# Altium PCB minireg-adp7102.PcbDoc
Units mm, origin at the board's own origin, x right, y up, seen from the top; angles counter-clockwise.
Board outline 10 x 10 mm, 4 copper layers (Top Layer, Mid-Layer 1, Mid-Layer 2, Bottom Layer); 9 components, 6 nets, 63 pads, 26 vias.
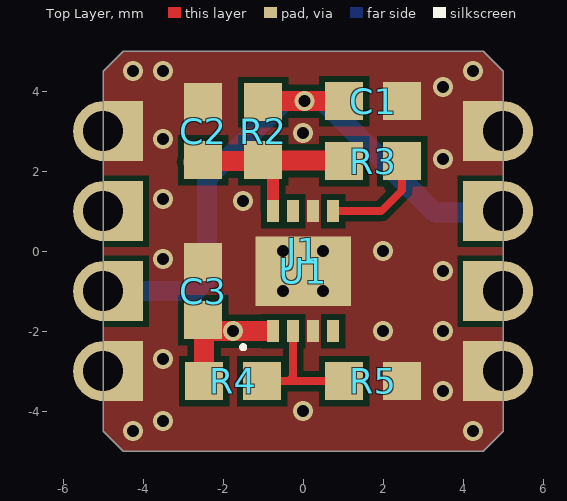
[diagram p0: Top Layer view]
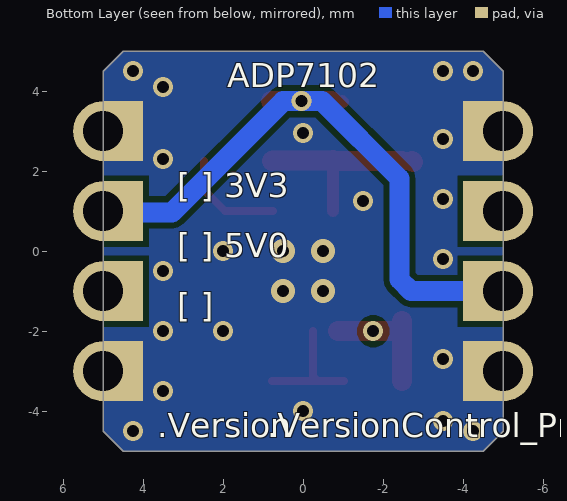
[diagram p1: Bottom Layer view, seen from below]
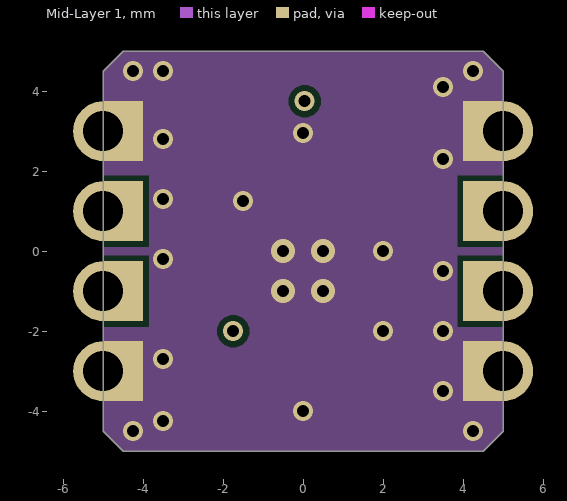
[diagram p2: Mid-Layer 1]
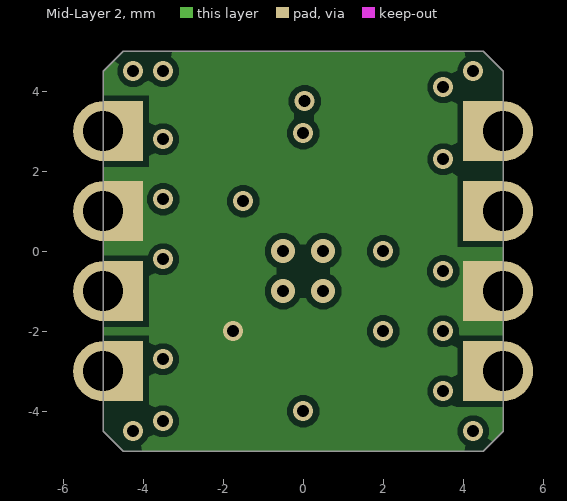
[diagram p3: Mid-Layer 2]
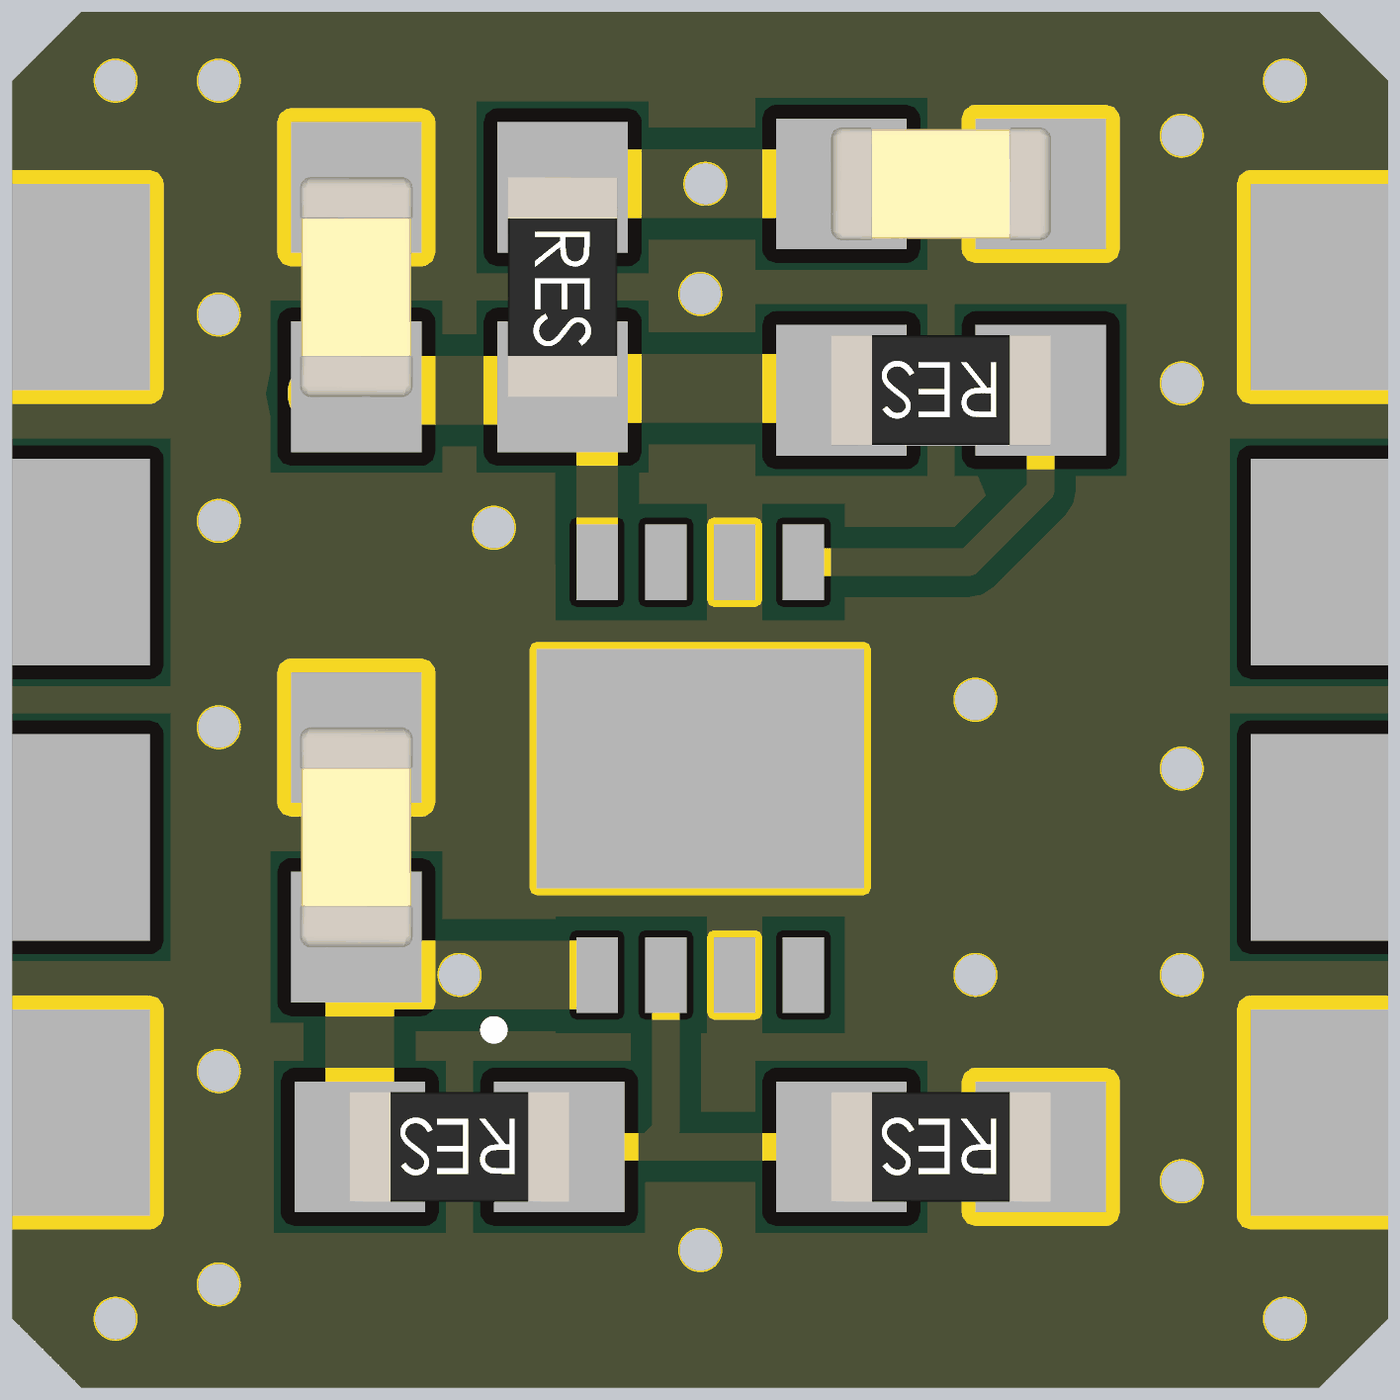
[diagram p4: 3D render of the assembled board from above, using the file's embedded part models]

## Layer stack, top to bottom
Top Solder: solder mask 0.0102, Solder Resist, Dk 3.5
Top Layer: signal copper 0.0356
Dielectric 1: dielectric 0.32, FR-4, Dk 4.8
Mid-Layer 1: signal copper 0.0356
Dielectric2: dielectric 0.32, FR-4, Dk 4.8
Mid-Layer 2: signal copper 0.0356
Dielectric3: dielectric 0.32, FR-4, Dk 4.8
Bottom Layer: signal copper 0.0356
Bottom Solder: solder mask 0.0102, Solder Resist, Dk 3.5

## Board outline
-5,-4.5 -4.5,-5 4.5,-5 5,-4.5 5,4.5 4.5,5 -4.5,5 -5,4.5

## Design rules (kind name [scope] priority, off if disabled: settings)
Clearance [All] p1: gap=0.15 ignorepadtopadclearanceinfootprint=FALSE
ComponentClearance ComponentClearance_1 [HasFootprint('MINIREG10x10')] p1: gap=0 collisioncheckmode=3 verticalgap=2540 showdistances=FALSE
ComponentClearance [All] p2: gap=0.254 collisioncheckmode=3 verticalgap=0.254 showdistances=FALSE
HoleSize [All] p1: absolutevalues=TRUE maxlimit=5 minlimit=0.2 maxpercent=80.000 minpercent=20.000
MinimumAnnularRing [All] p1: minimumring=0.1
MinimumSolderMaskSliver [All] p1: minsoldermaskwidth=0.15
PasteMaskExpansion [All] p1: expansion=0 percent=-20.000000
PolygonConnect [All] p1: connectstyle=Direct reliefconductorwidth=0.254 reliefentries=4 polygonreliefangle="90 Angle" airgapwidth=0.254
RoutingVias [All] p1: holewidth=0.711 width=0.3 viastyle="Through Hole" minholewidth=0.711 minwidth=0.2 maxholewidth=0.711 maxwidth=1
SolderMaskExpansion [All] p1: expansion=0.1 istentingtop=FALSE
SupplyNets "Schematic Supply Nets_2" [InNet('GND')] p1: voltage=0.000
SupplyNets "Schematic Supply Nets_1" [InNet('VOUT')] p2: voltage=0.000
SupplyNets "Schematic Supply Nets" [InNet('VIN')] p3: voltage=0.000
Width [All] p1: maxlimit=0.5 minlimit=0.15 preferedwidth=0.2
26 further rules are at their usual default settings.

## Components (designator, comment, footprint, x,y, rotation, side; value= is the part's Value field where it differs from the comment)
C1 "CAP" CAP0603 1.75,3.75 r180 top value=NF
C2 "CAP" CAP0603 -2.5,3 r270 top value=1uF
C3 "CAP" CAP0603 -2.5,-1 r270 top value=1uF
J1 "MINIREG10x10" MINIREG8_10x10R 0,0 r0 top locked
R2 "RES" RES0603 -1,3 r270 top value=0R
R3 "RES" RES0603 1.75,2.25 r180 top value=100K
R4 "RES" RES0603 -1.75,-3.25 r180 top value=40.2K
R5 "RES" RES0603 1.75,-3.25 r180 top value=13K
U1 "ADP7102-ACPZ-R7" ADP7102ACPZ-R7 0,-0.5 r90 top

## Footprints (in the part's own frame and the unit in brackets; to place one, negate y for a bottom-side part, rotate by r counter-clockwise, add the part's x,y. Pads: shape width x height; smd on the part's side, far side on the other; paste and mask are expansions set on the pad)
ADP7102ACPZ-R7 [mm] "SON, 8-Leads, Body 3x3mm, Pitch 0.5mm, Thermal Pad 1.74x2.38mm"
  rect 0.55x0.3 smd mask+0.05: 1(-1.5,0.75) 2(-1.5,0.25) 3(-1.5,-0.25) 4(-1.5,-0.75) 5(1.5,-0.75) 6(1.5,-0.25) 7(1.5,0.25) 8(1.5,0.75)
  rect 1.74x2.38 smd mask+0.05: 9(0,0)
  silkscreen extent -1.95,1.45 -1.85,1.55, body extent -1.5,-1.5 1.5,1.5, height 0.8
CAP0603 [mm]
  rect 0.95x0.95 smd: 1(-0.725,0) 2(0.725,0)
  body extent -0.8,-0.41 0.8,0.41, height 0.57
MINIREG8_10x10R [mm] "8-pin 10x10mm castellated regulator footprint"
  round 1.5 hole 1: 1(-5,-3) 2(-5,-1) 3(-5,1) 4(-5,3) 5(5,3) 6(5,1) 7(5,-1) 8(5,-3)
  rect 1x1.5 smd: 1(-4.5,-3) 2(-4.5,-1) 3(-4.5,1) 4(-4.5,3) 5(4.5,3) 6(4.5,1) 7(4.5,-1) 8(4.5,-3)
  rect 1x1.5 on Mid1: 1(-4.5,-3) 2(-4.5,-1) 3(-4.5,1) 4(-4.5,3) 5(4.5,3) 6(4.5,1) 7(4.5,-1) 8(4.5,-3)
  rect 1x1.5 smd far side: 1(-4.5,-3) 2(-4.5,-1) 3(-4.5,1) 4(-4.5,3) 5(4.5,3) 6(4.5,1) 7(4.5,-1) 8(4.5,-3)
  rect 1x1.5 on Mid2: 1(-4.5,-3) 2(-4.5,-1) 3(-4.5,1) 4(-4.5,3) 5(4.5,3) 6(4.5,1) 7(4.5,-1) 8(4.5,-3)
RES0603 [mm]
  rect 0.95x0.95 smd: 1(-0.725,0) 2(0.725,0)
  body extent -0.8,-0.4 0.8,0.4, height 0.3

## Part data
C1: library part CAP-SM-0603-NF, "CAP SM 0603 N/F", Manufacturer=GENERIC, Package=0603, Part Number=CAP-SM-0603-NF
C2 C3: library part CAP-SM-0603-X7R-1uF, "CAP SM 0603 X7R 1uF", Manufacturer=GENERIC, Package=0603, Part Number=CAP-SM-0603-X7R-1uF
R2: library part RES-SM-0603-0R, "RES SM 0603 0R", Manufacturer=GENERIC, Package=0603, Part Number=RES-SM-0603-0R
R3: library part RES-SM-0603-100K, "RES SM 0603 100K", Manufacturer=GENERIC, Package=0603, Part Number=RES-SM-0603-100K
R4: library part RES-SM-0603-40.2K, "RES SM 0603 40.2K", Manufacturer=GENERIC, Package=0603, Part Number=RES-SM-0603-40.2K
R5: library part RES-SM-0603-13K, "RES SM 0603 10K", Manufacturer=GENERIC, Package=0603, Part Number=RES-SM-0603-13K
U1: library part ADP7102-ACPZ, "300 mA, Low Noise, CMOS LDO, 3.3 to 20 V Vin, 1.22 to Vin-Vdo Vout, Industrial, 8-pin SON (CP-8-5), Reel", Manufacturer="Analog Devices", PartNumber=ADP7102ACPZ-R7, Supply Current IGND @ Small Load=400uA, ComponentLink1Description="Manufacturer URL", ComponentLink1URL=http://www.analog.com/en/index.html, ComponentLink2Description=Datasheet, ComponentLink2URL=http://www.analog.com/static/imported-files/data_sheets/ADP7102.pdf, ComponentLink3Description="Package Specification", ComponentLink3URL=http://www.analog.com/static/imported-files/packages/PKG_PDF/LFCSP(CP)/CP_8_5.pdf, ComponentLink4Description="URL Link1", ComponentLink4URL="Product URL:http://www.analog.com/en/ADP7102/productSearch.html", DatasheetVersion="Rev. A", Iout max=300mA, Mounting Technology="Surface Mount", PackageDescription="8-Pin Lead Frame Chip Scale Package, Body 3 x 3 mm, Pitch 0.5 mm", PackageReference=CP-8-5, PackageVersion="031208-A, 03/2008", Packing=Reel, Vin (max) (V)=20, Vin (min) (V)=3.3, Vout Adjustable Range="1.22V to 19V"

## Via types
v1: diameter 0.5, hole 0.3, Top Layer to Bottom Layer, tented both sides, 22 vias
v2: diameter 0.6, hole 0.3, Top Layer to Bottom Layer, tented bottom, 4 vias

## Nets (pads, with @x,y where several pads share a name; then routed paths per layer and width w, separated by ;. In a path a pad name is that pad's centre, name@x,y a point inside that pad or via, vN(x,y) a via of type N, cw(c..) or ccw(c..) an arc to the next point about the centre after c; other vN are vias at no path point)
EN: R3.1 U1.5 | length 2.7
  Top Layer w0.2: U1.5 1.95,1 2.475,1.525 R3.1
GND: C1.1 C2.1 C3.1 J1.1 J1.4 J1.5 J1.8 R5.1 U1.3 U1.6 U1.9
  other v1: -4.25,-4.5 4.25,-4.5 -3.5,-4.25 0,-4 3.5,-3.5 -3.5,-2.7 2,-2 3.5,-2 3.5,-0.5 -3.5,-0.2 2,0 -1.5,1.25 -3.5,1.3 3.5,2.3 -3.5,2.8 0,2.95 3.5,4.1 -4.25,4.5 -3.5,4.5 4.25,4.5
  other v2: -0.5,-1 0.5,-1 -0.5,0 0.5,0
NetC2_2: C2.2 R2.2 R3.2 U1.8 | length 4.6
  Top Layer w0.3: U1.8 R2.2@-0.75,2.275
  Top Layer w0.5: C2.2@-2.75,2.225 C2.2@-2.725,2.25 ; C2.2@-2.475,2.25 -0.775,2.25 -0.75,2.275 -0.738,2.262 0.762,2.262 R3.2@0.775,2.25
NetR4_1: R4.1 R5.2 U1.2 | length 3.1
  Top Layer w0.2: R4.1 -0.367,-3.25 ; U1.2 -0.25,-3.133 -0.367,-3.25 ; R5.2@0.775,-3.25 -0.367,-3.25
VIN: C1.2 J1.2 J1.6 R2.1 | length 16.8
  Top Layer w0.3: R2.1 R2.1@-0.975,3.75
  Top Layer w0.5: R2.1@-0.725,3.75 v1(0.038,3.75) C1.2@0.8,3.75
  Bottom Layer w0.5: J1.2@-5,-1 -2.7,-1 -2.407,-0.707 -2.407,1.818 -0.475,3.75 0.5,3.75 3.277,0.973 4.677,0.973 4.825,0.825 J1.6@5,1 ; J1.6@4.5,1.1 J1.6@5,1.1
VOUT: C3.2 J1.3 J1.7 R4.2 U1.1 | length 3.1
  Top Layer w0.3: C3.2 C3.2@-2.475,-1.75
  Top Layer w0.5: R4.2 C3.2@-2.475,-1.75 ; C3.2@-2.4,-2 U1.1@-0.875,-2
  other v1: -1.75,-2
pads on no net: U1.4 U1.7

## Polygon pours and split planes (outlines as drawn)
GND on Top Layer "GND_L01_P000" (solid, pour order 0): -4.5,5 -5,4.5 -5,-4.5 -4.5,-5 4.5,-5 5,-4.5 5,4.5 4.5,5
GND on Mid-Layer 1 "GND_L02_P001" (solid, pour order 1): -4.5,5 -5,4.5 -5,-4.5 -4.5,-5 4.5,-5 5,-4.5 5,4.5 4.5,5
VOUT on Mid-Layer 2 "VOUT_L03_P002" (solid, pour order 2): -4.5,5 -5,4.5 -5,-4.5 -4.5,-5 4.5,-5 5,-4.5 5,4.5 4.5,5
GND on Bottom Layer "GND_L04_P003" (solid, pour order 3): -4.5,5 -5,4.5 -5,-4.5 -4.5,-5 4.5,-5 5,-4.5 5,4.5 4.5,5

## Silkscreen, mask and mechanical layers (free items; w line width, h text height)
Bottom Overlay:
  text "ADP7102" at 1.9,4.1 h0.6
  text "[ ] 3V3" at 3.15,1.35 h0.6
  text "[ ] 5V0" at 3.15,-0.15 h0.6
  text "[ ]" at 3.15,-1.65 h0.6
  text ".VersionControl_ProjFolderRevNumberShort" at 0.9,-4.65 h0.6
  text ".Version" at 3.65,-4.65 h0.6
Mechanical 1:
  the board outline again, w0.1